# EAGLE board LED_order (EAGLE 9.6.2)
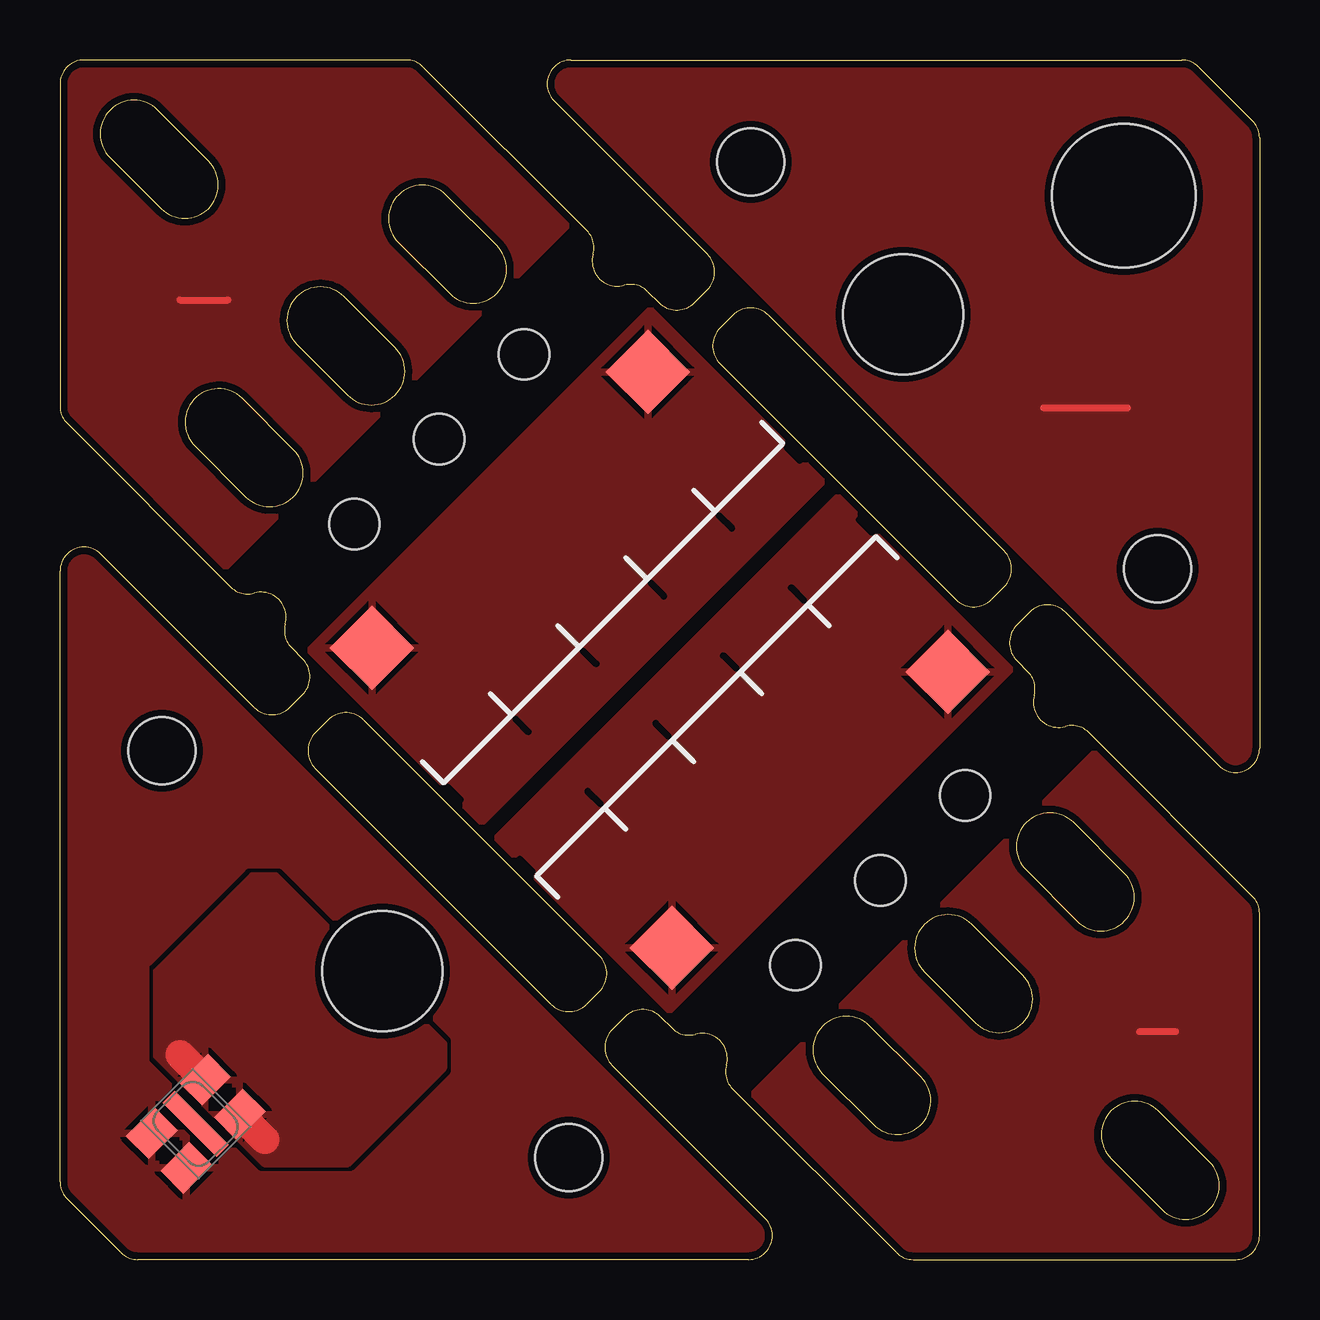
[diagram p0: board, top side]

Size 50 x 50 mm. Coordinates in mm from the lower left corner, seen from the top.
Outline: 14.44,50 1,50 arc90 0,49 0,35.57 arc45 0.29,34.86 7.12,28.03 arc61 8.1,27.78 arc-122 9.39,26.48 arc61 9.65,25.5 10.12,25.04 arc-90 10.12,23.55 9.58,23.02 arc-90 8.1,23.02 1.71,29.41 arc135 0,28.7 0,3.24 arc45 0.29,2.54 2.54,0.29 arc45 3.24,0 28.7,0 arc135 29.41,1.71 23.02,8.1 arc-90 23.02,9.58 23.55,10.12 arc-90 25.04,10.12 25.5,9.65 arc61 26.48,9.39 arc-122 27.78,8.1 arc61 28.03,7.12 34.86,0.29 arc45 35.56,0 49,0 arc90 50,1 50,14.44 arc45 49.71,15.14 42.88,21.97 arc61 41.9,22.22 arc-122 40.61,23.52 arc61 40.35,24.5 39.88,24.97 arc-90 39.88,26.45 40.42,26.98 arc-90 41.9,26.98 48.29,20.59 arc135 50,21.3 50,46.76 arc45 49.71,47.46 47.46,49.71 arc45 46.76,50 21.3,50 arc135 20.59,48.29 26.98,41.9 arc-90 26.98,40.42 26.45,39.89 arc-90 24.96,39.89 24.5,40.35 arc61 23.52,40.61 arc-122 22.22,41.9 arc61 21.97,42.88 15.14,49.71 arc45 14.44,50
Outline: 28.04,39.36 27.51,38.82 arc90 27.51,37.34 37.34,27.51 arc90 38.82,27.51 39.36,28.04 arc90 39.36,29.53 29.53,39.36 arc90 28.04,39.36
Outline: 11.18,22.49 10.64,21.96 arc90 10.64,20.47 20.47,10.64 arc90 21.96,10.64 22.49,11.18 arc90 22.49,12.66 12.66,22.49 arc90 11.18,22.49
Outline: 9.73,33.77 7.61,35.89 arc180 5.62,33.91 7.75,31.79 arc180 9.73,33.77
Outline: 13.97,38.01 11.85,40.13 arc180 9.87,38.15 11.99,36.03 arc180 13.97,38.01
Outline: 18.21,42.25 16.09,44.38 arc180 14.11,42.4 16.23,40.27 arc180 18.21,42.25
Outline: 2.09,45.93 4.21,43.81 arc180 6.19,45.79 4.07,47.91 arc180 2.09,45.93
Outline: 40.27,16.23 42.4,14.11 arc180 44.38,16.09 42.25,18.21 arc180 40.27,16.23
Outline: 36.03,11.99 38.15,9.87 arc180 40.13,11.85 38.01,13.97 arc180 36.03,11.99
Outline: 31.79,7.75 33.91,5.63 arc180 35.89,7.61 33.77,9.73 arc180 31.79,7.75
Outline: 47.91,4.07 45.79,6.19 arc180 43.81,4.21 45.93,2.09 arc180 47.91,4.07
Copper layers (1*16): Top 0.035mm / dielectric 1.5mm / Bottom 0.035mm
Design rules "default *": minimum track width 6mil, minimum drill 0.35mm, track to track 6mil, track to pad 6mil, pad to pad 6mil, via to via 6mil, smd to smd 6mil, copper to edge 0.3mm, drill to drill 6mil, minimum pad ring 10mil, minimum via ring 8mil, stop-mask expansion 4mil, vias tented up to drill 0mil, thermal gap 10mil
Holes 2.1 mm at 12.27,30.66 15.81,34.19 19.34,37.73 37.73,19.34 34.19,15.81 30.66,12.27
Holes 6 mm at 44.34,44.34
Holes 2.8 mm at 28.79,45.76 45.76,28.79 21.21,4.24 4.24,21.21
Holes 5 mm at 13.44,12.02 35.15,39.39
tRestrict: 17 lines

## Footprints (pad centres in the part's own frame; a part is rotated, then mirrored left to right if it is on the bottom)
ML-E = smd 1.7 x 1.35: A@1 1.575,-1.025; A@2 1.575,1.025; C@1 -1.575,-1.025; C@2 -1.575,1.025 | smd 0.7 x 3.2: TH 0,0
SMD2,5-2,5 = smd 2.5 x 2.5: 1 0,0

## Placement (x,y rotation side)
LED4  LED_EPML-E  [ML-E]  5.66,5.66 225 top
PAD1  PAD2.5-2.5  [SMD2,5-2,5]  13,25.5 45 top
PAD2  PAD2.5-2.5  [SMD2,5-2,5]  25.5,13 45 top
PAD3  PAD2.5-2.5  [SMD2,5-2,5]  24.5,37 45 top
PAD4  PAD2.5-2.5  [SMD2,5-2,5]  37,24.5 45 top

## Library data of the parts
LED4 PAD1-PAD4 = 0 my parts

## Nets
A: PAD1.1 PAD3.1
A1: LED4.A@1 LED4.A@2
K: PAD2.1 PAD4.1
K1: LED4.C@1 LED4.C@2

## Tracks (layer width: path | path; a pad name or v marks a point on that pad's centre or on a via)
A
  pour Top: 10,25 25,40 32.25,32.75 17.25,17.75
A1
  pour Top (rank 6): 0,0 31.5,0 0,31.5
K
  pour Top: 40,25 25,10 17.75,17.25 32.75,32.25
K1
  Top 1.2: LED4.C@2 8.54,5 | LED4.C@1 5,8.54
  pour Top: 16,9 9,16 8,16 4,12 4,8.5 8.5,4 12,4 16,8
N$5
  Top 0.3: 44.5,35.5 41,35.5
  pour Top: 50,50 18.5,50 50,18.5
N$6
  Top 0.3: 5,40 7,40
  pour Top: 0,50 15,50 21.5,43.5 6.5,28.5 0,35
N$7
  Top 0.3: 46.5,9.5 45,9.5
  pour Top: 28.75,6.75 43.5,21.5 50,15 50,0 35.5,0